# Altium PCB PCB2.PcbDoc
Units mil, origin at the board's own origin, x right, y up, seen from the top; angles counter-clockwise.
Board outline 3945 x 2005 mil, 4 copper layers (Top Layer 1, 3v3, gnd, Bottom Layer 1), stack 23.756 mil thick; 53 components, 40 nets, 256 pads, 252 vias.
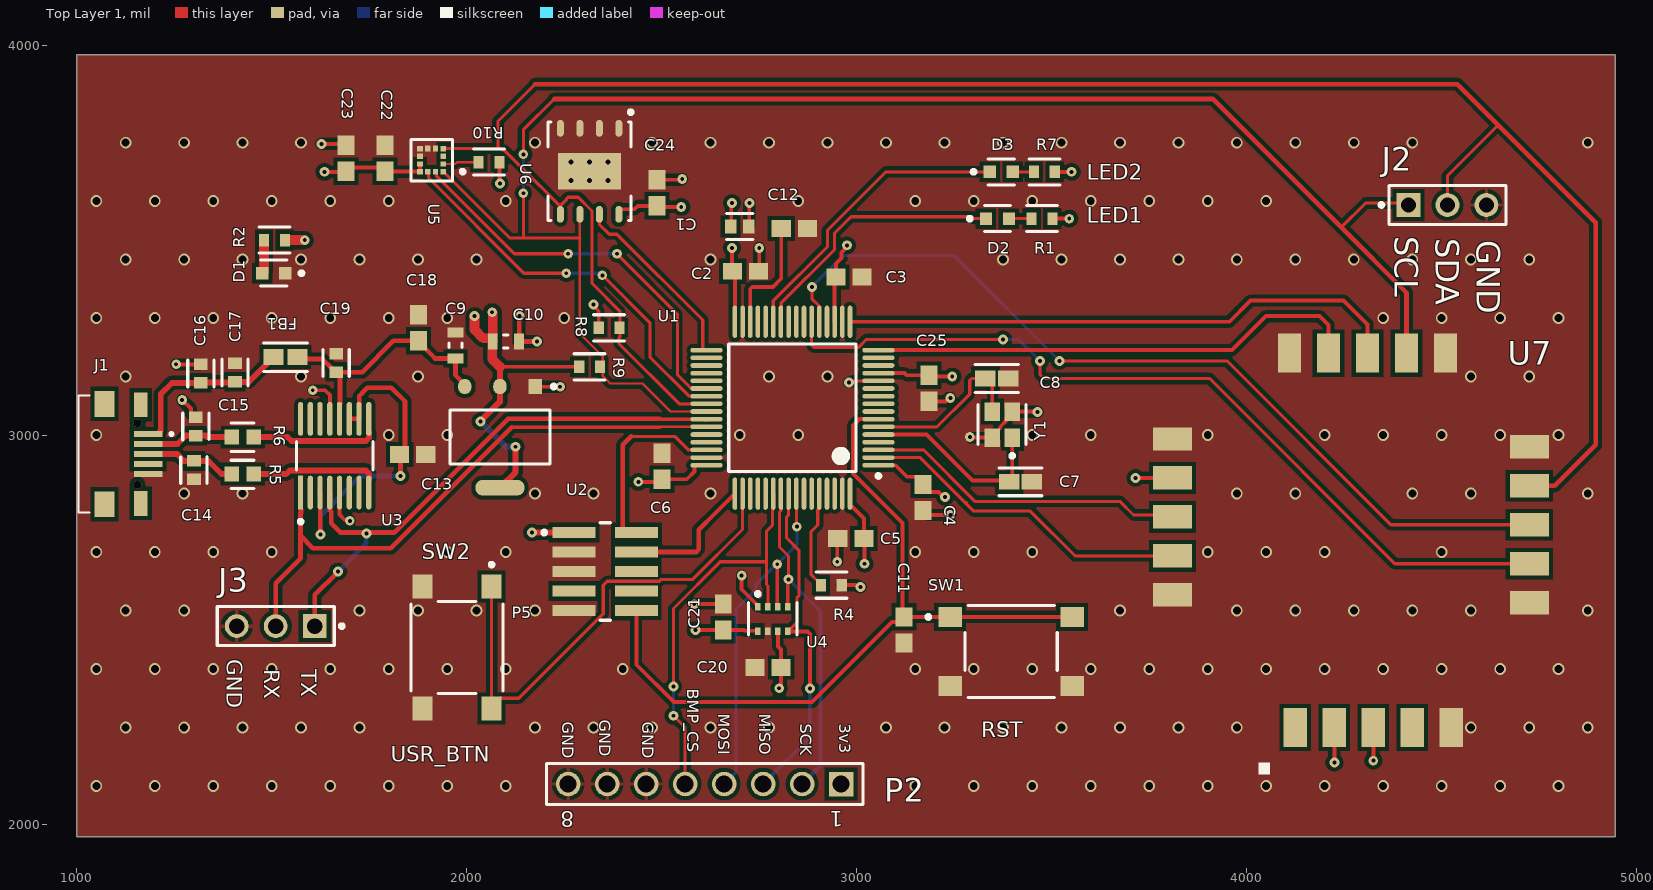
[diagram p0: Top Layer 1 view]
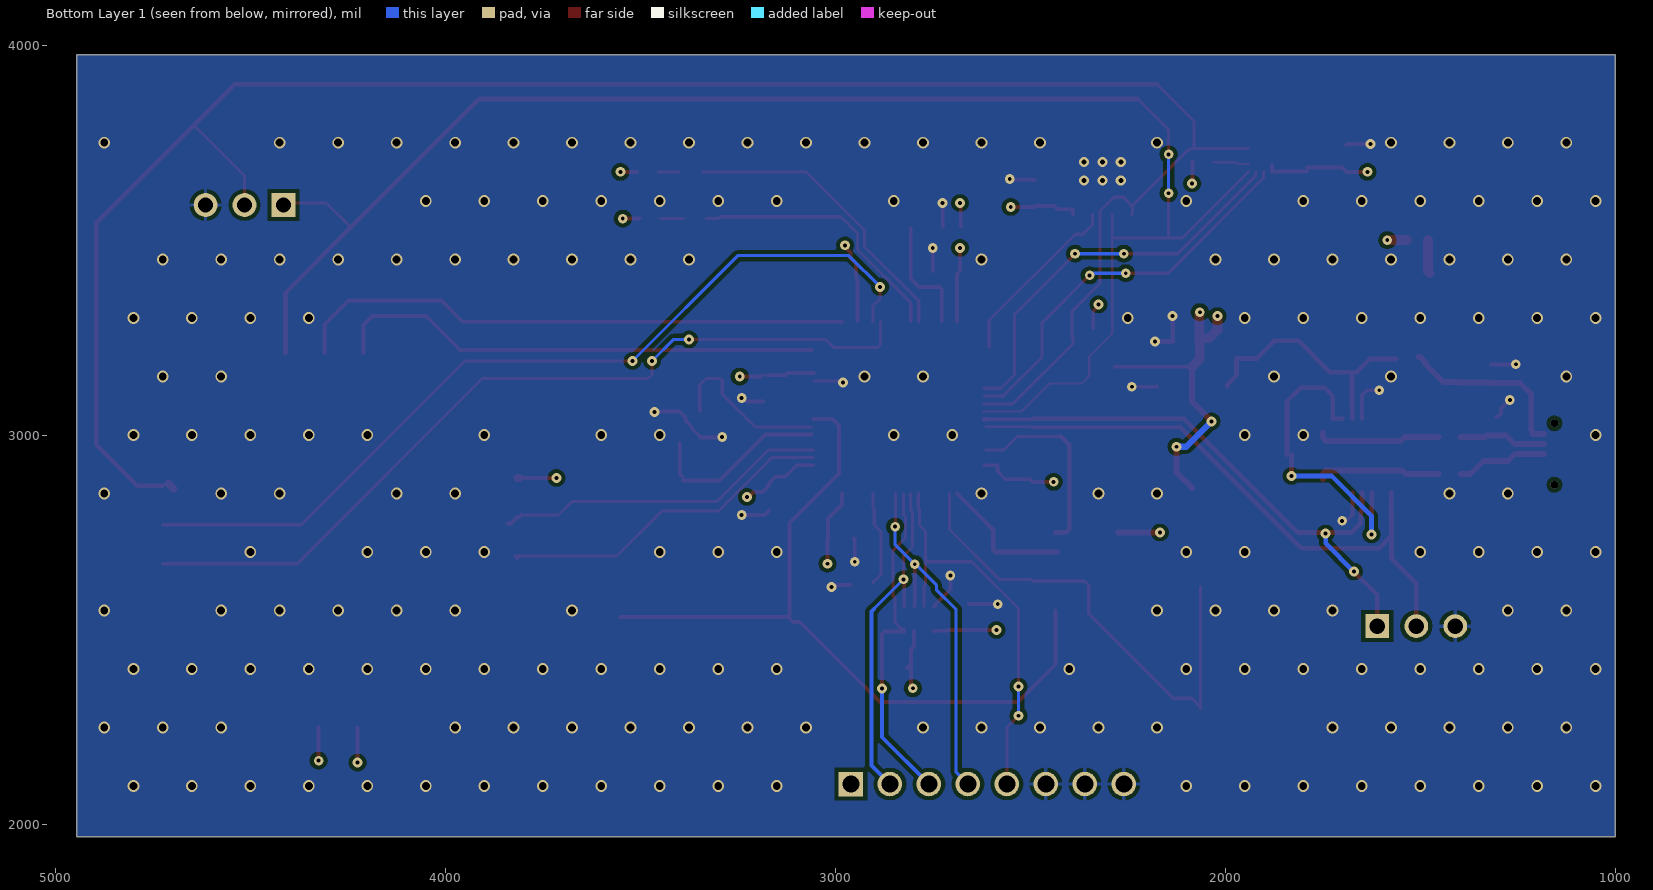
[diagram p1: Bottom Layer 1 view, seen from below]
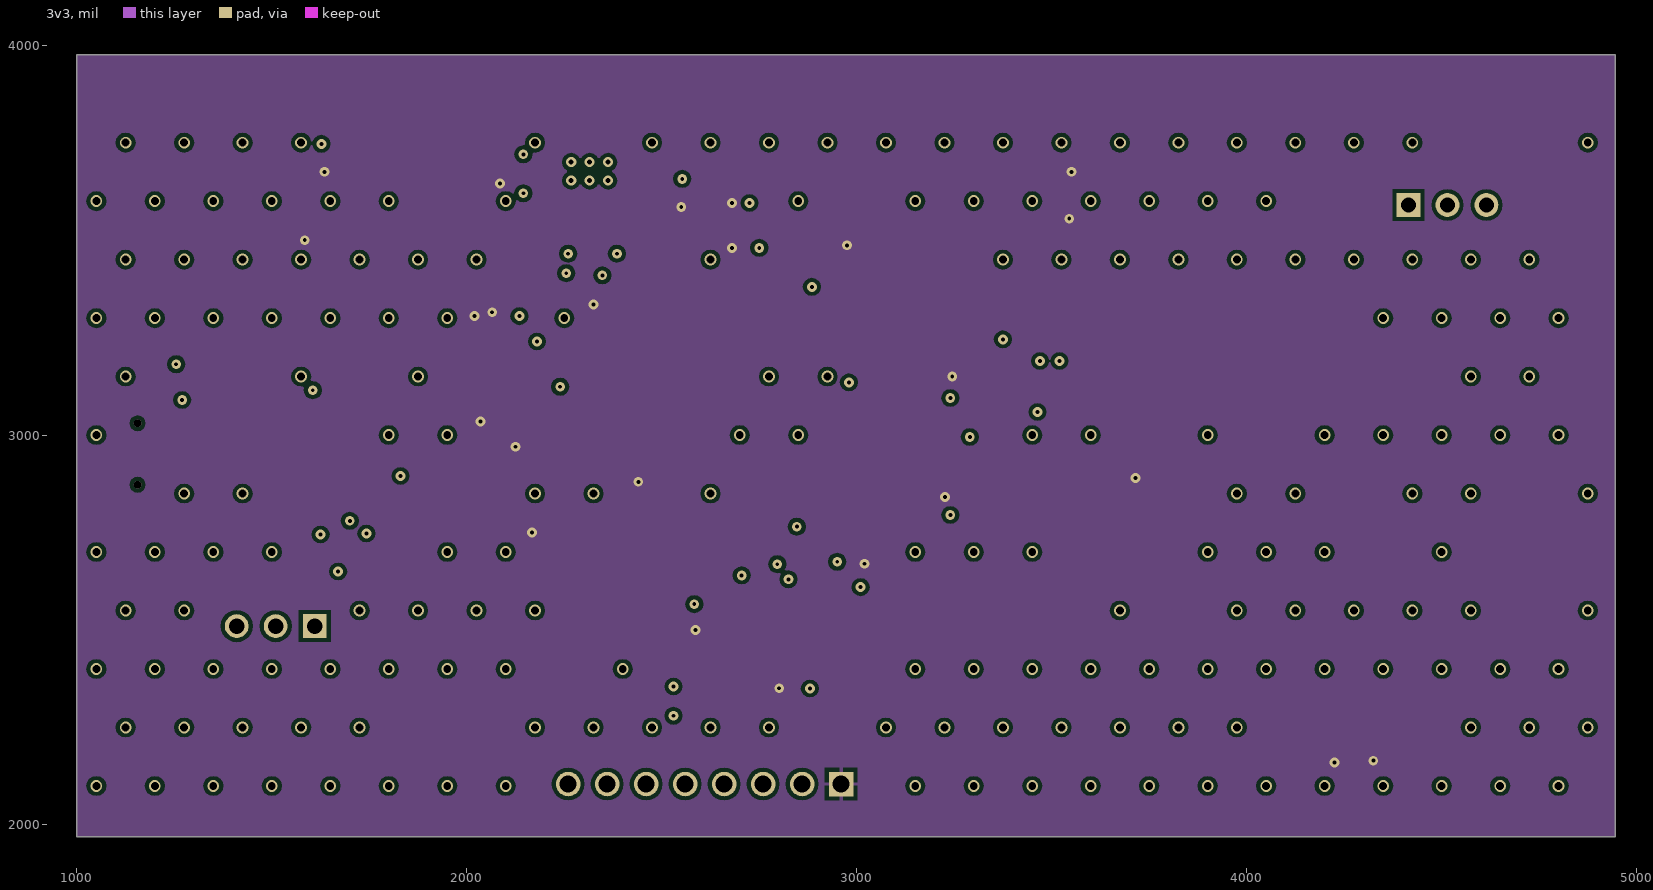
[diagram p2: 3v3]
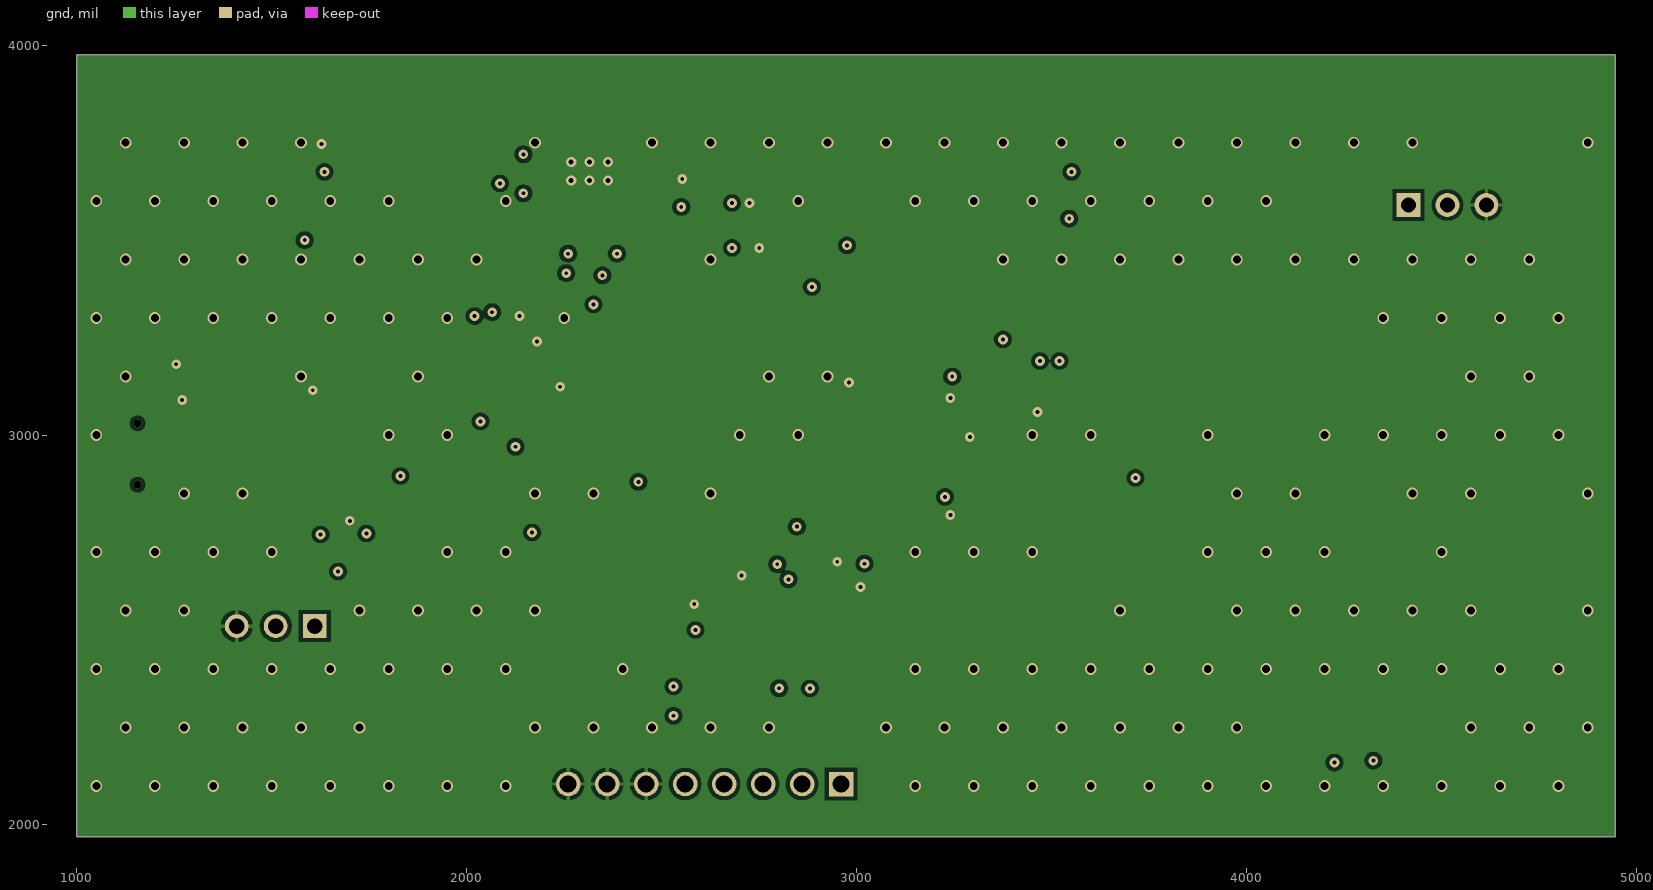
[diagram p3: gnd]
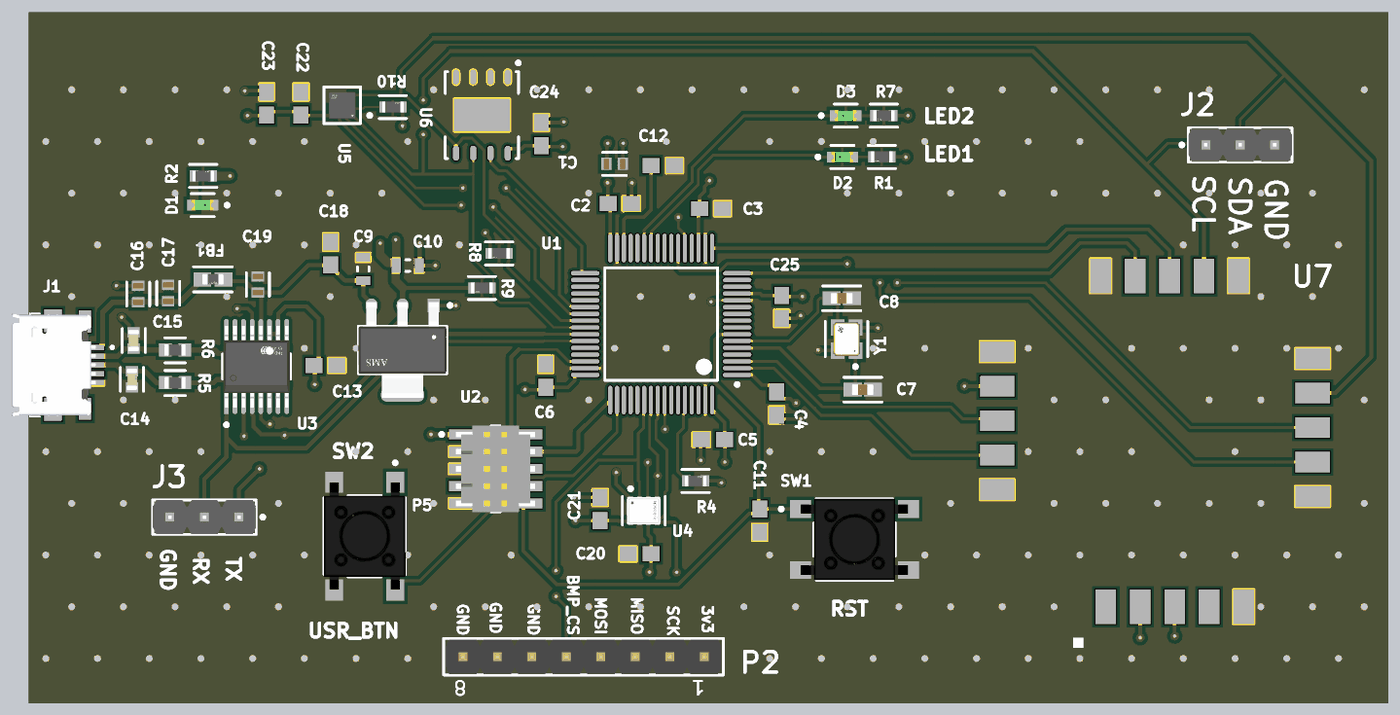
[diagram p4: 3D render of the assembled board from above, using the file's embedded part models]

## Layer stack, top to bottom
Top Solder: solder mask 0.4, Solder Resist, Dk 3.5
Top Layer 1: signal copper 1.378
Dielectric 2: prepreg 2.8, PP-006, Dk 4.1
3v3: signal copper 1.4
Dielectric 1: dielectric 12.6, FR-4, Dk 4.8
gnd: signal copper 1.4
Dielectric 3: prepreg 2.8, PP-006, Dk 4.1
Bottom Layer 1: signal copper 1.378
Bottom Solder: solder mask 0.4, Solder Resist, Dk 3.5

## Board outline
1000,1970 1000,3975 4945,3975 4945,1970

## Design rules (kind name [scope] priority, off if disabled: settings)
Clearance [All] p1: gap=10 ignorepadtopadclearanceinfootprint=FALSE except(0: Arc-Hole Track-Hole SMDPad-Hole THPad-Hole Via-Hole Fill-Hole Poly-Hole Region-Hole Text-Hole; 5: SMDPad-SMDPad; 6: Arc-SMDPad Track-SMDPad)
DiffPairsRouting [All] p1: maxlimit=10 minlimit=10 mostfreqgap=10 toplayer_minwidth=15 toplayer_maxwidth=15 toplayer_prefwidth=15 midlayer1_minwidth=15 midlayer1_maxwidth=15 midlayer1_prefwidth=15 midlayer2_minwidth=15 midlayer2_maxwidth=15 midlayer2_prefwidth=15 bottomlayer_minwidth=15 bottomlayer_maxwidth=15 bottomlayer_prefwidth=15 maxuncoupledlength=500
PolygonConnect [All] p1: thpad.connectstyle=Relief thpad.reliefconductorwidth=10 thpad.reliefentries=4 thpad.polygonreliefangle="90 Angle" thpad.airgapwidth=10 smdpad.connectstyle=Direct smdpad.reliefconductorwidth=10 smdpad.reliefentries=4 smdpad.polygonreliefangle="90 Angle" smdpad.airgapwidth=10 via.connectstyle=Direct via.reliefconductorwidth=10 via.reliefentries=4 via.polygonreliefangle="90 Angle" via.airgapwidth=10
RoutingVias RoutingVias_1 [All] p1: holewidth=28 width=50 viastyle="Through Hole" minholewidth=28 minwidth=50 maxholewidth=28 maxwidth=50
SolderMaskExpansion StichingViaTented [IsVia] p1: expansion=4 istentingtop=TRUE
SolderMaskExpansion SolderMaskExpansion_1 [All] p2: expansion=4 istentingtop=FALSE
Width [All] p1: maxlimit=50 minlimit=6 preferedwidth=10
29 further rules are at their usual default settings.

## Classes and differential pairs
differential pair D: +D_P -D_N
differential pair usb: +usb_P -usb_N

## Components (designator, comment, footprint, x,y, rotation, side; value= is the part's Value field where it differs from the comment)
C1 "" FP-C0603-CG-MFG 2700,3535 r0 top value=4.7uF
C2 "100n" CAPC1608X90X35ML15T15 2715,3420 r180 top
C3 "100n" CAPC1608X90X35ML15T15 2980,3405 r180 top
C4 "100n" CAPC1608X90X35ML15T15 3170,2840 r90 top
C5 "100n" CAPC1608X90X35ML15T15 2985,2735 r0 top
C6 "100n" CAPC1608X90X35ML15T15 2500.37,2920 r270 top
C7 "" FP-C1608-080-0_1-IPC_A 3420,2880 r0 top
C8 "" FP-C1608-080-0_1-IPC_A 3359.15,3145 r0 top
C9 "C1608X5R0J226M080AC" CAPC1608X100X20ML10 1971.02,3230 r90 top
C10 "C1608X5R0J226M080AC" CAPC1608X100X20ML10 2100,3240 r0 top
C11 "0603YC104KAZ2A" CAPC1608X90X35ML15T15 3121.33,2500 r90 top
C12 "0603YC104KAZ2A" CAPC1608X90X35ML15T15 2840,3530 r180 top
C13 "100n" CAPC1608X90X35ML15T15 1861.26,2950 r180 top
C14 "" FP-C0603C-CF-MFG 1300,2910 r270 top value="47 pF"
C15 "" FP-C0603C-CF-MFG 1305,3022.37 r90 top value="47 pF"
C16 "" FP-C0603-CG-MFG 1317.89,3157.37 r90 top value=4.7uF
C17 "" FP-C0603-CG-MFG 1405.24,3160 r90 top value=4.7uF
C18 "100n" CAPC1608X90X35ML15T15 1876.36,3275.09 r270 top
C19 "" FP-C0603-CG-MFG 1665,3185 r90 top value=4.7uF
C20 "100n" CAPC1608X90X35ML15T15 2772.68,2403.46 r0 top
C21 "100n" CAPC1608X90X35ML15T15 2657.68,2533.55 r270 top
C22 "100n" CAPC1608X90X35ML15T15 1790.26,3709.98 r270 top
C23 "100n" CAPC1608X90X35ML15T15 1690.26,3709.98 r270 top
C24 "100n" CAPC1608X90X35ML15T15 2487.69,3621.38 r270 top
C25 "100n" CAPC1608X90X35ML15T15 3185,3120 r90 top
D1 "LTST-C190GKT" FP-LTST-C190GKT-MFG 1505,3415.19 r180 top
D2 "LTST-C190GKT" FP-LTST-C190GKT-MFG 3360.88,3555 r0 top
D3 "LTST-C190GKT" FP-LTST-C190GKT-MFG 3370.47,3675 r0 top
FB1 "BLM18PG121SN1D" FP-BLM18-0_15-t0_8-IPC_A 1535,3200 r0 top
J1 "MICROQTJ" SHOUHAN_MICROQTJ 1155.6,2951.26 r270 top
J2 "90120-0123" FP-90120-0123-MFG 4515,3590 r0 top
J3 "90120-0123" FP-90120-0123-MFG 1510,2510 r180 top
P2 "61300811121" 61300811121 2610,2105 r180 top
P5 "FTSH-105-01-F-DV-K" SMTC-FTSH-105-01-L-DV-K_V 2355,2650 r270 top
R1 "RC0603FR-071KL" FP-RC0603-0_55-IPC_C 3475.17,3555.19 r180 top
R2 "RC0603FR-071KL" FP-RC0603-0_55-IPC_C 1506.64,3500 r0 top
R4 "RC0603FR-071KL" FP-RC0603-0_55-IPC_C 2935,2615 r0 top
R5 "27r" FP-CRCW0603-e3-IPC_B 1425,2900 r0 top
R6 "27r" FP-CRCW0603-e3-IPC_B 1425,2995 r0 top
R7 "RC0603FR-071KL" FP-RC0603-0_55-IPC_C 3481.12,3675 r180 top
R8 "RC0603FR-071KL" FP-RC0603-0_55-IPC_C 2365,3275 r180 top
R9 "RC0603FR-071KL" FP-RC0603-0_55-IPC_C 2315,3175 r180 top
R10 "RC0603FR-071KL" FP-RC0603-0_55-IPC_C 2056.9,3699.98 r0 top
SW1 "PTS645SM43SMTR92LFS" FP-PTS645SM43SMTR92LFS-MFG 3396.11,2445 r0 top
SW2 "PTS645SM43SMTR92LFS" FP-PTS645SM43SMTR92LFS-MFG 1975,2455 r270 top
U1 "STM32F401RCT6" STM-LQFP64_M 2835.19,3070.19 r180 top
U2 "AMS1117-3.3" FP-AMS1117-IPC_C 2084.95,2994.71 r270 top
U3 "FT230XS-R" FP-SSOP-16-MFG 1661.21,2947 r90 top
U4 "BMP280" FP-BMP280-MFG 2784.81,2528.55 r90 top
U5 "LIS2DH12TR" FP-LGA-12-8365767-MFG 1909.84,3704.98 r180 top
U6 "24AA128-I/MF" DFNS-MF8_PS 2315,3676.38 r270 top
U7 "SAM-M10Q-00B-Breakout" SAM-M10Q-00B 4300,2775 r90 top locked
Y1 "NX2520SA-16MHZ-STD-CSW-5" FP-NX2520SA-MFG 3373.21,3026.48 r90 top

## Footprints (in the part's own frame and the unit in brackets; to place one, negate y for a bottom-side part, rotate by r counter-clockwise, add the part's x,y. Pads: shape width x height; smd on the part's side, far side on the other; paste and mask are expansions set on the pad)
61300811121 [mm] "Pin Header, pitch 2.54 mm, THT, Vertical, single row, 8p"
  rect 1.6x1.6 hole 1.1: 1(-8.89,0)
  round 1.6 hole 1.1: 2(-6.35,0) 3(-3.81,0) 4(-1.27,0) 5(1.27,0) 6(3.81,0) 7(6.35,0) 8(8.89,0)
  silkscreen extent -10.31,-1.34 10.31,1.34, body extent -10.16,-1.27 10.16,1.27, height 8.57
CAPC1608X90X35ML15T15 [mm] "Chip Capacitor, 2-Leads, Body 1.60x0.81mm, IPC Low Density"
  rect 1.25x1.1 smd: 1(-0.85,0) 2(0.85,0)
  body extent -0.88,-0.48 0.87,0.48, height 0.9
CAPC1608X100X20ML10 [mm] "Chip Capacitor, 2-Leads, Body 1.70x0.90mm, IPC Low Density"
  rect 0.65x1.05 smd: 1(-0.85,0) 2(0.85,0)
  silkscreen extent -0.15,-0.42 0.15,0.42, body extent -0.85,-0.45 0.85,0.45, height 1
DFNS-MF8_PS [mm] "SON, 8-Leads, Body 5x6mm, Pitch 1.27mm, Microchip Recommended"
  oval 1.1x0.45 smd: 1(-2.8,1.905) 2(-2.8,0.635) 3(-2.8,-0.635) 4(-2.8,-1.905) 5(2.8,-1.905) 6(2.8,-0.635) 7(2.8,0.635) 8(2.8,1.905)
  rect 2.4x4.1 smd: 9(0,0)
  silkscreen extent -3.97,-2.7 3.2,2.81, body extent -3.05,-2.55 3.05,2.55, height 1
FP-90120-0123-MFG [mm]
  rect 1.55x1.55 hole 1 paste-1000 mask+0: 1(-2.54,0)
  round 1.55 hole 1 paste-1000 mask+0: 2(0,0) 3(2.54,0)
  silkscreen extent -4.42,-1.27 3.81,1.27, body extent -3.91,-1.37 3.91,1.37, height 0.25
FP-AMS1117-IPC_C [mm]
  rect 1.004x0.872 smd paste+0 mask+0: 1(-3.295,2.29)
  rrect100% 1.004x0.872 smd paste+0 mask+0: 2(-3.295,0) 3(-3.295,-2.29)
  rrect87% 1.004x3.182 smd paste+0 mask+0: 4(3.295,0)
  silkscreen extent -3.42,-3.25 1.75,3.63, body extent -3.9,-3.35 3.9,3.35, height 0.25
FP-BLM18-0_15-t0_8-IPC_A [mil]
  rect 51.42x41.66 smd paste+0 mask+0: 1(-30.55,0) 2(30.55,0)
  silkscreen extent -56,-37 56,37, body extent -76,-41 76,41, height 10
FP-BMP280-MFG [mm]
  rect 0.5x0.35 smd paste+0 mask+0: 1(0.8,0.975) 2(0.8,0.325) 3(0.8,-0.325) 4(0.8,-0.975) 5(-0.8,-0.975) 6(-0.8,-0.325) 7(-0.8,0.325) 8(-0.8,0.975)
  silkscreen extent -1.05,-1.58 1.75,1.57, body extent -1.55,-1.8 1.55,1.8, height 0.25
FP-C0603-CG-MFG [mm]
  rect 0.75x0.9 smd paste+0 mask+0: 1(-0.6,0) 2(0.6,0)
  silkscreen extent -0.87,-0.85 0.87,0.85, body extent -1.2,-0.6 1.2,0.6, height 0.25
FP-C0603C-CF-MFG [mm]
  rect 0.75x0.9 smd paste+0 mask+0: 1(-0.6,0) 2(0.6,0)
  silkscreen extent -0.87,-0.85 0.88,0.85, body extent -1.2,-0.6 1.2,0.6, height 0.25
FP-C1608-080-0_1-IPC_A [mil]
  rect 52.4x39.85 smd paste+0 mask+0: 1(-29.15,0) 2(29.15,0)
  silkscreen extent -55,-36 55,36, body extent -75,-40 75,40, height 10
FP-CRCW0603-e3-IPC_B [mil]
  rect 36.81x37.88 smd paste+0 mask+0: 1(-28.17,0) 2(28.17,0)
  silkscreen extent -30,-37 30,35, body extent -56,-29 56,29, height 10
FP-LGA-12-8365767-MFG [mm]
  rect 0.375x0.35 smd paste-1000 mask+0: 1(-0.762,0.75) 2(-0.762,0.25) 3(-0.762,-0.25) 4(-0.762,-0.75) 7(0.763,-0.75) 8(0.763,-0.25) 9(0.763,0.25) 10(0.763,0.75)
  rect 0.35x0.375 smd paste-1000 mask+0: 5(-0.25,-0.763) 6(0.25,-0.763) 11(0.25,0.763) 12(-0.25,0.763)
  silkscreen extent -2.15,-1.35 1.35,1.35, body extent -1.58,-1.58 1.58,1.57, height 0.25
FP-LTST-C190GKT-MFG [mm]
  rect 0.8x0.8 smd paste+0 mask+0: 1(-0.75,0) 2(0.75,0)
  silkscreen extent -1.92,-0.85 0.85,0.85, body extent -1.25,-0.55 1.25,0.55, height 0.25
FP-NX2520SA-MFG [mm]
  rect 1.2x1 smd paste+0 mask+0: 1(-0.85,-0.65) 2(0.85,-0.65) 3(0.85,0.65) 4(-0.85,0.65)
  silkscreen extent -2.15,-1.56 1.3,1.58, body extent -1.55,-1.25 1.55,1.25, height 0.25
FP-PTS645SM43SMTR92LFS-MFG [mm]
  rect 1.55x1.3 smd paste+0 mask+0: 1(-3.975,2.25) 2(3.975,2.25) 3(-3.975,-2.25) 4(3.975,-2.25)
  silkscreen extent -5.52,-3 3,3, body extent -4.85,-3.1 4.85,3.1, height 0.25
FP-RC0603-0_55-IPC_C [mil]
  rect 25.93x31.97 smd paste+0 mask+0: 1(-26.64,0) 2(26.64,0)
  silkscreen extent -40,-33 40,33, body extent -44,-22 44,22, height 10
FP-SSOP-16-MFG [mm]
  rect 2.2x0.345 smd paste+0 mask+0: 1(-2.4,2.222)
  rrect100% 2.2x0.345 smd paste+0 mask+0: 2(-2.4,1.587) 3(-2.4,0.952) 4(-2.4,0.317) 5(-2.4,-0.318) 6(-2.4,-0.953) 7(-2.4,-1.588) 8(-2.4,-2.222) 9(2.4,-2.222) 10(2.4,-1.587) 11(2.4,-0.952) 12(2.4,-0.317) 13(2.4,0.318) 14(2.4,0.953) 15(2.4,1.588) 16(2.4,2.222)
  silkscreen extent -4.42,-2.5 0.93,2.5, body extent -3.6,-2.75 3.6,2.75, height 0.25
SAM-M10Q-00B [mil]
  rect 100x60 smd: 1(-525,175) 2(-525,75) 3(-525,-25) 4(-525,-125) 5(-525,-225) 11(435,-210) 12(435,-110) 13(435,-10) 14(435,90) 15(435,190)
  rect 60x100 smd: 6(-205,-425) 7(-105,-425) 8(-5,-425) 9(95,-425) 10(195,-425) 16(215,490) 17(115,490) 18(15,490) 19(-85,490) 20(-185,490)
  Top Layer 1 lines w10: -85,490 -90,485 ; 15,485 -1.42,468.58 -1.42,459.77 ; -90,485 -85,480 ; -90,485 -85,480 ; -90,485 -85,480 ; -90,485 -85,480 ; -90,485 -85,480 ; -90,485 -85,480 ; -90,485 -85,480 ; -90,485 -85,480
  Top Layer 1 lines w20: 115,490 115,484.42 ; 87.15,-397.15 95,-405 100,-410
  silkscreen extent -645,240 -615,270
SHOUHAN_MICROQTJ [mm]
  rect 0.4x1.85 smd: 1(-1.3,0.685) 2(-0.65,0.685) 3(0,0.685) 4(0.65,0.685) 5(1.3,0.685)
  rect 1.625x0.9 smd: SH1(-3.212,0.21) SH2(3.212,0.21)
  rect 1.69x1.3 smd: SH3(-3.27,-2.15) SH4(3.27,-2.15)
  round 0.5 hole 0.5 unplated: ""(-2,0) ""(2,0)
  silkscreen extent -3.8,-3.85 3.8,2.31, body extent -3.8,-5.2 3.8,1, height 2.58
SMTC-FTSH-105-01-L-DV-K_V [mm] "CONN, 10-Leads, Body 6.35x3.43mm, Pitch 1.27mm"
  rect 0.74x2.79 smd: 1(-2.54,-2.035) 2(-2.54,2.035) 3(-1.27,-2.035) 4(-1.27,2.035) 5(0,-2.035) 6(0,2.035) 7(1.27,-2.035) 8(1.27,2.035) 9(2.54,-2.035) 10(2.54,2.035)
  silkscreen extent -3.18,-4.1 3.17,0.34, body extent -3.17,-2.92 3.18,2.92, height 6.12
STM-LQFP64_M [mm] "Thin QFP, 64-Leads, Body 10x10mm, Pitch 0.5mm, IPC Low Density"
  oval 2.1x0.3 smd: 1(-5.6,3.75) 2(-5.6,3.25) 3(-5.6,2.75) 4(-5.6,2.25) 5(-5.6,1.75) 6(-5.6,1.25) 7(-5.6,0.75) 8(-5.6,0.25) 9(-5.6,-0.25) 10(-5.6,-0.75) 11(-5.6,-1.25) 12(-5.6,-1.75) 13(-5.6,-2.25) 14(-5.6,-2.75) 15(-5.6,-3.25) 16(-5.6,-3.75) 33(5.6,-3.75) 34(5.6,-3.25) 35(5.6,-2.75) 36(5.6,-2.25) 37(5.6,-1.75) 38(5.6,-1.25) 39(5.6,-0.75) 40(5.6,-0.25) 41(5.6,0.25) 42(5.6,0.75) 43(5.6,1.25) 44(5.6,1.75) 45(5.6,2.25) 46(5.6,2.75) 47(5.6,3.25) 48(5.6,3.75)
  oval 0.3x2.1 smd: 17(-3.75,-5.6) 18(-3.25,-5.6) 19(-2.75,-5.6) 20(-2.25,-5.6) 21(-1.75,-5.6) 22(-1.25,-5.6) 23(-0.75,-5.6) 24(-0.25,-5.6) 25(0.25,-5.6) 26(0.75,-5.6) 27(1.25,-5.6) 28(1.75,-5.6) 29(2.25,-5.6) 30(2.75,-5.6) 31(3.25,-5.6) 32(3.75,-5.6) 49(3.75,5.6) 50(3.25,5.6) 51(2.75,5.6) 52(2.25,5.6) 53(1.75,5.6) 54(1.25,5.6) 55(0.75,5.6) 56(0.25,5.6) 57(-0.25,5.6) 58(-0.75,5.6) 59(-1.25,5.6) 60(-1.75,5.6) 61(-2.25,5.6) 62(-2.75,5.6) 63(-3.25,5.6) 64(-3.75,5.6)
  silkscreen extent -5.72,-4.15 4.15,4.57, body extent -5,-5 5,5, height 1.6

## Part data
C1 C16 C17 C19: library part CMP-2006-02256-2, "CAP CER 4.7UF 6.3V X5R 0603", Capacitance=4.7uF, Manufacturer=Kemet, Manufacturer Part Number=C0603C475K9PACTU, Package=C0603-CG, Temperature="-55°C to +85°C", Temperature Characteristic=X5R, Temperature Coefficient=15%, Temperature Range High=+85°C, Temperature Range Low=-55°C, Tolerance=10%, Voltage Rating=6.3V, Automotive=No, Category=Cap, ComponentLink2Description=Datasheet, ComponentLink2URL=https://content.kemet.com/datasheets/KEM_C1006_X5R_SMD.pdf, Device Class L1="Passive Components", Device Class L2=Capacitors, Device Class L3="Ceramic Capacitors", Digikey Description="CAP CER 4.7UF 6.3V X5R 0603", Height=0.9mm, Ipc Land Pattern Name=CAPC16080X80, Lead Free=Yes, Material=Ceramic, Mouser Description="Multilayer Ceramic Capacitors MLCC - SMD/SMT 6.3volts 4.7uF X5R 10%", Octopart=https://octopart.com/c0603c475k9pactu-kemet-104242, RoHS=TRUE
C2 C3 C4 C5 C6 C13 C18 C20 C21 C22 C23 C24 C25: library part CMP-2006-04496-1, Manufacturer="AVX Interconnect / Elco", Part Number=0603YC104KAZ2A
C7 C8: library part CMP-08246-005081-1, "Multilayer Ceramic Capacitors 8pF ±0.5pF 50V C0G SMD 0603", Capacitance=8pF, Case Code (Imperial)=0603, Case Code (Metric)=1608, Dielectric=C0G, Dielectric Material=Ceramic, Insulation Resistance=10GR, Max Operating Temperature=125°C, Min Operating Temperature=-55°C, Package Quantity=1, Voltage Rating=50V, Case/Package=0603, Construction=Flat, Depth=0.8mm, Height=0.8mm, Lead Free="Lead Free", Length=1.6mm, Mount="Surface Mount", Packaging="Tape and Reel", Radiation Hardening=No, REACH SVHC="No SVHC", RoHS Compliant=Yes, Series=C, Termination=SMD/SMT, Thickness=0.037inch, Voltage Rating (DC)=50V, Weight=7.1E-05oz, Width=0.031inch
C9 C10: library part CMP-2000-05440-1, "Chip Capacitor, 22 uF, +/- 20%, 6.3 V, -55 to 85 degC, 1608 (0603 Metric), RoHS, Tape and Reel", Capacitance=22µF, Manufacturer=TDK, Operating Temperature=-55degC~85degC, Package / Case=0603(1608Metric), Package Description="2-Pin Surface Mount Device, Body 1.6 x 0.8 mm", Package Reference=603, PCN Part Number=MLCCPartNumberChange30/Nov/2012, Ratings=-, Standard Package=1, Temperature Coefficient=X5R, Tolerance=±20%, Voltage - Rated=6.3V, Applications=GeneralPurpose, Category=Capacitors, Datasheet URL=http://www.farnell.com/datasheets/1913358.pdf, Datasheet Version=Mar-15, Design Resources=20WNon-IsolatedBuckLEDDriverUsingPLLNK460KG, Family=CeramicCapacitors, Features=-, Height - Seated (Max)=-, Kits=445-9003-KIT-ND-KITCAPCERHICAPMLCCSMD, Lead Spacing=-, Lead Style=-, Manufacturer URL=http://www.tdk.com/, Mounting Type=SurfaceMount,MLCC, Online Catalog=CSeries,GeneralPurpose, Other Names=445-8028-1, Packaging=CutTape(CT), Product Training Modules=CSeriesGeneralApplicationsSEAT,CCV,andTVCLDesignToolsGuidetoReplacinganElectrolyticCapacitorwithanMLCC, RoHS Information=RoHSCertificate-MLCC, Series=C, Size / Dimension="0.063\"Lx0.031\"W(1.60mmx0.80mm)", Thickness (Max)="0.039\"(1.00mm)"
C11 C12: library part CMP-2006-04496-1, Manufacturer="AVX Interconnect / Elco", Part Number=0603YC104KAZ2A
C14 C15: library part CMP-2006-03321-2, "CAP CER 47PF 100V 5% NP0 0603", Capacitance="47 pF", Manufacturer=KEMET, Manufacturer Part Number=C0603C470J1GACTU, Package=C0603C-CF, Temperature="-55°C to +125°C", Temperature Characteristic=C0G, Temperature Coefficient=30ppm/°C, Temperature Range High=+125°C, Temperature Range Low=-55°C, Tolerance=0.05, Voltage Rating="100 V", Automotive=Yes, Automotive Grade="Grade 1", Category=Cap, ComponentLink2Description=Datasheet, ComponentLink2URL=https://api.kemet.com/component-edge/download/datasheet/C0603C100J5GACAUTO.pdf, Device Class L1="Passive Components", Device Class L2=Capacitors, Device Class L3="Ceramic Capacitors", Digikey Description="CAP CER 47PF 100V 5% NP0 0603", Height=0.87mm, Lead Free=Yes, Material=Ceramic, Mouser Description="Multilayer Ceramic Capacitors MLCC - SMD/SMT 100volts 47pF C0G 5%", Octopart=https://octopart.com/c0603c470j1gactu-kemet-3768219, RoHS=TRUE
D1 D2 D3: library part CMP-22017-000005-2, "LED GREEN CLEAR CHIP SMD", Case Code (Imperial)=0603, Case Code (Metric)=1608, Color=Green, Forward Current=30mA, Forward Voltage=2.1V, Lens Color=Colorless, Max Operating Temperature=85°C, Min Operating Temperature=-55°C, Package Quantity=1, Power Dissipation=100mW, Reverse Voltage=5V, Test Current=10mA, Voltage=2V, Case/Package=0603, Depth=0.8mm, Dominant Wavelength=569nm, Height=0.8mm, Illumination Color=Green, Lead Free="Lead Free", Length=1.6mm, Lens Style=Clear, Lens Transparency=Clear, Luminous Intensity=6mcd, Mount="Surface Mount", Number of Elements=1, Number of LEDs=1, Number of Pins=2, Packaging="Tape and Reel", Power Rating=100mW, Radiation Hardening=No, Viewing Angle=130°, Wavelength=565nm, Width=0.8mm
FB1: library part CMP-0686-00557-7, "Chip Ferrite Bead, 0603, 120Ω @ 100MHz, 0.05Ω, 25%, 2A", Case Code (Imperial)=0603, Case Code (Metric)=1608, Current Rating=2A, DC Resistance (DCR)=50mR, Frequency=100MHz, Max Operating Temperature=125°C, Min Operating Temperature=-55°C, Package Quantity=1, Tolerance=25%, Case/Package=0603, Core Material=Ferrite, DC Current=2A, Depth=0.8mm, Height=0.8mm, Impedance=120R, Lead Free="Lead Free", Length=1.6mm, Material=Steel, Max Current Rating=2A, Max DC Current=2A, Number of Circuits=1, Number of Lines=1, Number of Pins=2, Packaging="Tape and Reel", Radiation Hardening=No, REACH SVHC="No SVHC", RoHS Compliant=Yes, Shielding=Unshielded, Termination=SMD/SMT, Test Frequency=100MHz, Width=0.8mm
J1: Package=None, Availability="Not in stock", Check_prices=https://www.snapeda.com/parts/MICROQTJ/Shouhan/view-part/?ref=eda, MF="shou han", MP=MICROQTJ, Price=None, SnapEDA_Link=https://www.snapeda.com/parts/MICROQTJ/Shouhan/view-part/?ref=snap
J2 J3: library part CMP-04776-000237-1, "CONN HEADER VERT 3POS 2.54MM", Color=Black, Contact Resistance=20mR, Current Rating=3A, Max Operating Temperature=125°C, Max Voltage Rating (DC)=350.35kV, Min Operating Temperature=-55°C, Voltage Rating=350V, Contact Gender=Male, Contact Material=Brass, Contact Mating Length=6.75mm, Contact Plating=Tin, Contact Post Length=2.9mm, Gender=Male, Glow Wire Compliant=Non-compliant, Housing Color=Black, Housing Material=Polyester, Lead Free="Lead Free", Mount="Through Hole", Number of Circuits=3, Number of Contacts=3, Number of Positions=3, Number of Rows=1, Orientation=Vertical, Packaging=Tray, Pitch=2.54mm, Radiation Hardening=No, REACH SVHC="No SVHC", RoHS Compliant=Yes, Series=90120, Termination=Solder, Voltage Rating (AC)=350V
P2: library part CMP-1502-01076-1, "THT Vertical Pin Header WR-PHD, Pitch 2.54 mm, Single Row, 8 pins", Contact Resistance=20mOhm, Manufacturer="Wurth Elektronik", Operating Temperature=-40to105degC, Rated Current=3A, Withstanding Voltage=500VAC, Working Voltage=250VAC, Datasheet URL=https://katalog.we-online.de/em/datasheet/6130xx11121.pdf, Gender=Male, Manufacturer URL=http://www.we-online.de, Mounting Technology=THT, Orientation=Vertical, Package Reference=61300811121, Packaging=Bag, Part Number=61300811121, Pin Number=8, Pitch=2.54mm, Publisher=WurthElektronik, Row Number=Single
P5: library part CMP-2000-05352-1, "Male Header, Pitch 1.27 mm, 2 x 5 Position, Height 6.12 mm, RoHS, Tube", Color=Black, Manufacturer=Samtec, Package Description="Male Header, Pitch 1.27 mm, 2 x 5 Position, Height 5.97 mm, Tail Length 4.32 mm", Package Reference=FTSH-105-01-L-DV-K, Category=Connectors,Interconnects, Connector Type=Header,Shrouded, Contact Finish=Gold, Contact Finish Thickness=3µin(0.08µm), Contact Mating Length="0.120\"(3.05mm)", Contact Type=MalePin, Datasheet URL=http://suddendocs.samtec.com/prints/ftsh-1xx-xx-xxx-dv-xxx-mkt.pdf, Datasheet Version="Rev. ET, 10/1995", Family=RectangularConnectors-Headers,MalePins, Fastening Type=-, Features=-, Manufacturer URL=http://www.samtec.com/, Mounting Type=SurfaceMount, Number of Positions=10, Number of Positions Loaded=All, Number of Rows=2, Package URL=http://suddendocs.samtec.com/prints/ftsh-1xx-xx-xxx-dv-xxx-footprint.pdf, Packaging=Tube, Pitch="0.050\"(1.27mm)", Row Spacing="0.050\"(1.27mm)", Series=FTSH, Termination=Solder
R1 R2 R4 R7 R8 R9 R10: library part CMP-1659-00009-5, "RES 1K OHM 1% 1/10W 0603", Case Code (Imperial)=0603, Case Code (Metric)=1608, Max Operating Temperature=155°C, Max Power Dissipation=100mW, Min Operating Temperature=-55°C, Resistance=1kR, Resistance Tolerance=1%, Resistor Type="Thick Film", Temperature Coefficient=100ppm/°C, Voltage Rating=50V, Case/Package=0603, Construction=Rectangular, Contact Plating=Tin, Depth=0.8mm, Features="Moisture Resistant", Height=0.45mm, Lead Free="Lead Free", Length=1.6mm, Military Standard=Not, Number of Terminations=2, Packaging="Tape and Reel", Power Rating=100mW, Radiation Hardening=No, REACH SVHC="No SVHC", RoHS Compliant=Yes, Series=RC, Size Code=0603, Technology="THICK FILM", Termination=SMD/SMT, Tolerance=1%
R5 R6: library part CMP-2000-03145-2, "RES Thick Film, 27Ω, 5%, 0.1W, 200ppm/°C, 0603", Case Code (Imperial)=0603, Case Code (Metric)=1608, Max Operating Temperature=155°C, Max Power Dissipation=100mW, Min Operating Temperature=-55°C, Package Quantity=1, Resistance=27R, Temperature Coefficient=200ppm/°C, Tolerance=5%, Voltage Rating=75V, Case/Package=0603, Composition="Thick Film", Contact Plating=Tin, Depth=0.85mm, Features="Automotive AEC-Q200", Height=0.45mm, Lead Free="Lead Free", Length=1.55mm, Military Standard=Not, Number of Pins=2, Number of Terminations=2, Packaging="Tape and Reel", Power Rating=100mW, Radiation Hardening=No, Termination=Solder, Voltage Rating (DC)=75V, Weight=7.1E-05oz, Width=0.85mm
SW1 SW2: library part CMP-2000-05160-2, "SWITCH TACTILE SPST-NO 0.05A 12V", Case/Package=SMD/SMT, Color=Black, Contact Resistance=100mR, Current Rating=50mA, Max Operating Temperature=60°C, Max Voltage Rating (DC)=12V, Min Operating Temperature=-20°C, Operating Force=160gf, Package Quantity=1, Actuator Length=0.85mm, Actuator Material=Nylon, Actuator Type=Standard, Contact Material=Silver, Contact Plating=Silver, Depth=9mm, Illumination Type=Non-Illuminated, Lead Free="Lead Free", Length=6mm, Max Current Rating=50mA, Mechanical Life=100000Cycles, Mount="Surface Mount", Orientation=Straight, Packaging="Tape and Reel", REACH SVHC="No SVHC", Switch Function=Off-Mom, Termination="Gull Wing", Throw Configuration=SPST, Voltage Rating (DC)=12V
U1: library part CMP-0243-00091-2, "ARM Cortex-M4 32-bit MCU+FPU, 105 DMIPS, 256 kB Flash, 64 kB Internal RAM, 48 I/Os, 64-pin LQFP, -40 to 85 degC, Tray", I/Os (High Current)=48, Manufacturer=STMicroelectronics, Operating Frequency(F) (Processor speed) (MHz)=84, Supply Voltage(Vcc) max (V)=3.6, Supply Voltage(Vcc) min (V)=1.8, ComponentLink1Description="Manufacturer URL", ComponentLink1URL=http://www.st.com/web/en/home.html, ComponentLink2Description=Datasheet, ComponentLink2URL=http://www.st.com/st-web-ui/static/active/en/resource/technical/document/data_brief/DM00071938.pdf, ComponentLink3Description="Package Specification", ComponentLink3URL=http://www.st.com/st-web-ui/static/active/en/resource/technical/document/datasheet/DM00037051.pdf, Core="ARM Cortex-M4", DatasheetVersion="Rev. 1", FLASH Size (Prog) (kB)=256, Internal RAM Size (kB)=64, Mounting Technology="Surface Mount", PackageDescription="64-Pin Low Profile Quad Flat Package, 10 x 10 mm Body, 0.5 mm Pitch", PackageReference=LQFP64, PackageVersion="Rev. 4, 06/2013", Packing=Tray, PartNumber=STM32F401RCT6
U2: library part CMP-209535-000001-1, "LDO Voltage Regulators 1A, 3.3V", Dropout Voltage=1.1V, Manufacturer="Advanced Monolithic Systems", Max Junction Temp=+125°C, Max Power Dissipation=1.2W, Max Supply Voltage=15V, Nominal Supply Current=5mA, Output Current=1A, Output Voltage=3.3V, Package=AMS1117, Temperature="-40°C to +125°C", Temperature Range Low=-40°C, Automotive=No, Category=IC, ComponentLink2Description=Datasheet, ComponentLink2URL=http://www.advanced-monolithic.com/pdf/ds1117.pdf, Device Class L1="Integrated Circuits (ICs)", Device Class L2="Power Management ICs", Device Class L3="Voltage Regulators - Linear", Height=1.8mm, Ipc Land Pattern Name=SOT229P700X180-4, Lead Free=Yes, Manufacturer Part Number=AMS1117-3.3, Number Of Outputs=1, Octopart=https://octopart.com/ams1117-3.3-advanced+monolithic+systems-25899300, Output Type=Fixed, RoHS=TRUE, Standoff Height=0.64mm, Temperature Range High=+125°C
U3: library part CMP-0248-00026-3, "IC USB SERIAL BASIC UART 16SSOP", Case/Package=SSOP, Max Operating Temperature=85°C, Max Supply Voltage=5.5V, Min Operating Temperature=-40°C, Min Supply Voltage=2.97V, Operating Supply Current=8mA, Operating Supply Voltage=5V, Package Quantity=3000, Data Rate=12Mbps, Height=0.059inch, Interface=UART, Length=5mm, Mount="Surface Mount", Number of Channels=1, Number of Pins=16, Packaging="Tape and Reel", Weight=0.004586oz, Width=0.157inch
U4: library part CMP-2000-05076-3, "SENSOR PRESSURE ABS", Case/Package=SMD/SMT, Max Operating Temperature=85°C, Min Operating Temperature=-40°C, Operating Pressure=15.95PSI, Lead Free="Lead Free", Max Pressure=290.08PSI, Number of Pins=8, Output Type=SPI, Port Style="No Port", Pressure Type=Absolute, Termination=SMD/SMT
U5: library part CMP-2000-05369-2, "ACCEL 2-16G I2C/SPI 12LGA", Case/Package=LGA, Max Operating Temperature=85°C, Max Supply Voltage=3.6V, Min Operating Temperature=-40°C, Min Supply Voltage=1.71V, Axis="X, Y, Z", Bandwidth=672Hz, Contact Plating=Gold, Height=1mm, Interface=I2C, Lead Free="Lead Free", Length=2.15mm, Mount="Surface Mount", Number of Pins=12, Output Type=SPI, Packaging="Cut Tape", Radiation Hardening=No, REACH SVHC="No SVHC", Width=2.15mm
U6: library part CMP-0159-00373-1, "128Kbit, 400kHz, 1.7V, I2C Serial EEPROM, 8-Pin DFN Punch Singulated, Industrial Temperature", DatasheetVersion="revR, Apr-2009", PackageDescription="8-Lead Plastic Dual Flat, No Lead Package (MF) - 6x5 mm Body [DFN-S] Punch Singulated", PackageReference=DFNS-MF8_PS, PackageVersion="revBB, Aug-2009"
Y1: library part CMP-2000-05279-2, "CRYSTAL 16.0000MHZ 8PF SMD", Case/Package=SMD/SMT, ESR (Equivalent Series Resistance)=80R, Frequency=16MHz, Frequency Stability=25ppm, Frequency Tolerance=15ppm, Load Capacitance=8pF, Max Operating Temperature=85°C, Min Operating Temperature=-40°C, Package Quantity=3000, Height=0.022inch, Length=0.098inch, Mount="Surface Mount", Number of Pins=4, Packaging="Tape and Reel", Series Resistance=80R, Width=0.079inch

## Via types
v1: diameter 30, hole 20, Top Layer 1 to Bottom Layer 1, tented both sides, 182 vias
v2: diameter 25, hole 10, Top Layer 1 to Bottom Layer 1, tented both sides, 64 vias
v3: diameter 25.98, hole 12.99, Top Layer 1 to Bottom Layer 1, tented top, 6 vias

## Nets (pads, with @x,y where several pads share a name; then routed paths per layer and width w, separated by ;. In a path a pad name is that pad's centre, name@x,y a point inside that pad or via, vN(x,y) a via of type N, cw(c..) or ccw(c..) an arc to the next point about the centre after c; other vN are vias at no path point)
3v3: C1.1 C2.2 C3.2 C4.2 C5.2 C6.2 C10.1 C20.2 C21.2 C22.2 C23.2 C24.2 C25.2 P2.1 P5.1 R1.1 R2.2 R7.1 R8.2 R9.2 R10.2 U1.1 U1.13 U1.19 U1.32 U1.48 U1.64 U2.2 U2.4 U4.6 U4.8 U5.9 U5.10 U6.8 U7.2 U7.3 U7.17 | length 3510.2
  Top Layer 1 w6: U1.48 U1.48@2619.71,2922.55
  Top Layer 1 w10: v2(1635,3675) 1688.74,3675 C23.2 1700.4,3686.65 C22.2@1790.26,3686.65 ; C22.2 1791.32,3675.45 U5.10 U5.9@1879.82,3692.93 ; R10.2 2084.27,3699.25 2084.27,3645.73 v2(2085,3645) ; 2084.95,3175.05 R9.2@2283.32,3175.05 ; v2(2325,3335) 2325,3330.94 2338.36,3317.58 R8.2 ; U6.8 2390,3579 2430.09,3579 2439,3587.91 C24.2 2490.6,3585 v2(2550,3585) ; v2(2440,2880) 2493.84,2880 C6.2 2564,2886.54 2584,2906.54 2584,2922.55 U1.48 ; v2(2586.46,2499.91) 2586.64,2500.09 C21.2 2710.62,2500.09 2712.68,2498.03 2745.45,2498.03 U4.8 ; C1.1 2678.19,3536.81 2678.19,3593.19 v2(2680,3595) ; v2(2680,3480) 2680,3421.54 C2.2 2687.55,3413.99 U1.32 ; U4.6 2797.61,2458.1 2806.14,2449.57 C20.2@2806.14,2412.86 ; v2(2801.18,2350.61) 2806.14,2355.58 C20.2 ; C20.2@2816,2403 C20.2@2815.54,2403.46 ; U1.19 2943.45,3397.45 C3.2 2946.54,3440 2961.04,3454.5 2961.04,3468.48 2975,3482.44 v2(2975,3486.5) ; U1.64 2982.82,2822 3018.46,2786.36 C5.2 3020,2733.46 v2(3020,2670) ; U1.1 3099,2922.55 3128.48,2893.07 3153.35,2893.07 3170,2876.42 C4.2 3170,2870.51 3186.65,2853.86 3209.89,2853.86 3222.34,2841.4 v2(3226.4,2841.4) ; U1.13 3122.31,3158.77 3127.62,3153.46 C25.2@3175,3153.46 ; C25.2 3188.46,3150 v2(3245,3150) ; R1.1 3502,3555 v2(3545,3555) ; R7.1 v2(3551.12,3675) ; v2(3715,2890) U7.17 ; v2(4225,2160) U7.2 ; v2(4325,2165) U7.3 ; C20.2 C20.2@2806.14,2412.86 ; C20.2 C20.2@2815.54,2403.46 ; C20.2@2806.14,2412.86 C20.2@2815.54,2403.46
  Top Layer 1 w16: v2(2035.01,3035.05) 2084.95,3084.99 U2.2 2084.95,3169 2084.95,3175.05 ; U2.4 2125,2905.03 v2(2125,2970) ; v2(2167.47,2750) P5.1
  Top Layer 1 w25: R2.2 1584.09,3500 v2(1584.35,3499.74) ; v2(2020,3305) 2020,3270.21 2042.04,3248.17 2066.24,3248.17 C10.1@2066.54,3247.87 ; C10.1@2065,3240 2065,3195 2084.95,3175.05 ; v2(2065,3315) 2066.54,3313.46 C10.1@2066.54,3247.87 ; C10.1 C10.1@2066.54,3247.87
  Bottom Layer 1 w16: v2(2035.01,3035.05) 2100.06,2970 v2(2125,2970)
BMP_CS: P2.5 U1.54 U4.2 | length 1050.5
  Top Layer 1 w8: v2(2530,2280) 2560,2250 P2.5 ; v2(2530,2355) 2530,2555 2650,2675 2768.5,2675 ; U4.2 2772.02,2613.04 2768.5,2616.56 2768.5,2675 ; U1.54 2787.22,2849.2 2787.22,2813.04 2787.4,2812.86 2783.87,2809.33 2783.87,2768.87 2768.5,2753.5 2768.5,2675
  Bottom Layer 1 w8: v2(2530,2280) v2(2530,2355)
D_N: R6.2 U3.9 | length 318
  Top Layer 1 w15: R6.2 1540,2995 1550.32,2984.68 1741.21,2984.68 1750,2993.47 1750,3005.89 U3.9@1749.42,3006.47
D_P: R5.2 U3.8 | length 317.6
  Top Layer 1 w15: R5.2 1536.76,2900 1546.08,2909.32 1741.21,2909.32 1750,2900.53 1750,2888.1 U3.8@1749.42,2887.53
DEBUG_RX: J3.2 U1.43 U3.1 | length 1552.5
  Top Layer 1 w6: 2495.97,3020.97 U1.43
  Top Layer 1 w8: 2115,3020 2495,3020 2495.97,3020.97
  Top Layer 1 w12: J3.2 1510,2620 1573.71,2683.71 1573.71,2741.29 ; 1573.71,2800 1573.71,2741.29 ; U3.1 1574.51,2852.3 1574.51,2810.11 1575,2809.61 1575,2800 ; 2115,3020 1805,2710 1605,2710 1573.71,2741.29
DEBUG_TX: J3.1 U1.42 U3.4 | length 1476.2
  Top Layer 1 w8: 2494.67,3042 2496.01,3040.66 2609.7,3040.66 U1.42@2609.7,3040.75
  Top Layer 1 w12: J3.1 1610,2590 v2(1670,2650) ; U3.4 1649.02,2852.21 1649.02,2806.59 1652.21,2803.4 1652.21,2774.1 1676.32,2750 1742.51,2750 1813.89,2750 2105.89,3042 2494.67,3042 ; U1.42@2609.7,3040.75 2619.62,3040.75 U1.42
  Bottom Layer 1 w12: v2(1670,2650) 1742.51,2722.51 v2(1742.51,2747.51)
EEPROM_WP: U1.33 U6.7 | length 462.6
  Top Layer 1 w8: U6.7 2340.08,3566.07 2340.08,3539.92 2365,3515 2385,3515 2605,3295 2605,3225
G\P\S\_\R\S\T\: U1.3 U7.18 | length 825.6
  Top Layer 1 w8: U1.3 3171.21,2961.92 3303.13,2830 3675,2830 3710,2795 U7.18@3805,2795
  Top Layer 1 w10: U7.18@3805,2795 U7.18
GND: C1.2 C2.1 C3.1 C4.1 C5.1 C6.1 C7.2 C8.2 C9.2 C10.2 C11.1 C12.1 C13.1 C14.2 C15.2 C16.2 C17.2 C18.1 C19.2 C20.1 C21.1 C22.1 C23.1 C24.1 C25.1 D1.1 J1.5 J2.3 J3.3 P2.6 P2.7 P2.8 P5.3 P5.5 P5.9 R4.2 SW1.3 SW1.4 SW2.3 SW2.4 U1.12 U1.18 U1.31 U1.47 U1.63 U2.1 U3.5 U3.13 U4.1 U4.7 U5.5 U5.6 U5.7 U5.8 U6.1 U6.2 U6.3 U6.4 U6.9 U7.5 U7.6 U7.10 U7.11 U7.15 U7.16 U7.20 Y1.2 Y1.4 | length 1453.2
  Top Layer 1 w8: v2(2980,3135) 2984.6,3135 2988.68,3139.08 U1.12
  Top Layer 1 w10: v2(1254.7,3181.59) 1255.29,3180.99 C16.2 ; v2(1270,3090) 1292.28,3067.72 1292.28,3055.76 1302.05,3045.99 C15.2 ; v2(1605,3115) 1635.94,3115 1648.71,3102.23 U3.13 ; v2(1627.05,3746.64) 1687.06,3746.64 C23.1 ; U3.5 1673.71,2795.86 1686.7,2782.87 1697.13,2782.87 v2(1700,2780) ; C10.2 C10.2@2134.23,3240.77 ; v2@2134.23,3304.23 v2(2135,3305) ; U2.1 2175.64,3123.9 v2(2239.43,3123.9) ; C24.1 2550.33,3654.84 v2(2552.44,3656.95) ; v2(2583.42,2566.27) 2584.17,2567.02 C21.1 ; v2(2705,2640) 2705,2604.43 2744.54,2564.89 2744.54,2561.94 U4.1 ; C1.2 2724.31,3535.69 2724.31,3594.31 v2(2725,3595) ; C2.1 2750,3421.54 v2(2750,3480) ; v2(2950,2675) 2950,2733.46 C5.1 ; R4.2 3000.94,2615 3005.94,2610 v2(3010,2610) ; C4.1 3181.54,2795 v2(3240,2795) ; C25.1 3227.48,3086.54 3235.94,3095 v2(3240,3095) ; v2@3292.42,2993.36 3347.27,2993.36 Y1.4 3347.62,2996.96 3368.11,3017.45 3368.11,3021.2 3384.11,3037.2 3384.11,3045.26 Y1.2 3462.75,3059.95 v2(3463.72,3058.98)
  Top Layer 1 w12: C10.2 v2(2180,3240) ; C10.2@2134.23,3240.77 v2@2134.23,3304.23
  other v1: 1050,2100 1200,2100 1350,2100 1500,2100 1650,2100 1800,2100 1950,2100 2100,2100 3150,2100 3300,2100 3450,2100 3600,2100 3750,2100 3900,2100 4050,2100 4200,2100 4350,2100 4500,2100 4650,2100 4800,2100 1125,2250 1275,2250 1425,2250 1575,2250 1725,2250 2175,2250 2325,2250 2475,2250 2625,2250 2775,2250 3075,2250 3225,2250 3375,2250 3525,2250 3675,2250 3825,2250 3975,2250 4575,2250 4725,2250 4875,2250 1050,2400 1200,2400 1350,2400 1500,2400 1650,2400 1800,2400 1950,2400 2100,2400 2400,2400 3150,2400 3300,2400 3450,2400 3600,2400 3750,2400 3900,2400 4050,2400 4200,2400 4350,2400 4500,2400 4650,2400 4800,2400 1125,2550 1275,2550 1725,2550 1875,2550 2025,2550 2175,2550 3675,2550 3975,2550 4125,2550 4275,2550 4425,2550 4575,2550 4875,2550 1050,2700 1200,2700 1350,2700 1500,2700 1950,2700 2100,2700 3150,2700 3300,2700 3450,2700 3900,2700 4050,2700 4200,2700 4500,2700 1275,2850 1425,2850 2175,2850 2325,2850 2625,2850 3975,2850 4125,2850 4425,2850 4575,2850 4875,2850 1050,3000 1800,3000 1950,3000 2700,3000 2850,3000 3450,3000 3600,3000 3900,3000 4200,3000 4350,3000 4500,3000 4650,3000 4800,3000 1125,3150 1575,3150 1875,3150 2775,3150 2925,3150 4575,3150 4725,3150 1050,3300 1200,3300 1350,3300 1500,3300 1650,3300 1800,3300 1950,3300 2250,3300 4350,3300 4500,3300 4650,3300 4800,3300 1125,3450 1275,3450 1425,3450 1575,3450 1725,3450 1875,3450 2025,3450 2625,3450 3375,3450 3525,3450 3675,3450 3825,3450 3975,3450 4125,3450 4275,3450 4425,3450 4575,3450 4725,3450 1050,3600 1200,3600 1350,3600 1500,3600 1650,3600 1800,3600 2100,3600 2850,3600 3150,3600 3300,3600 3450,3600 3600,3600 3750,3600 3900,3600 4050,3600 1125,3750 1275,3750 1425,3750 1575,3750 2175,3750 2475,3750 2625,3750 2775,3750 2925,3750 3075,3750 3225,3750 3375,3750 3525,3750 3675,3750 3825,3750 3975,3750 4125,3750 4275,3750 4425,3750 4875,3750
  other v2: 3290,2995
  other v3: 2267.76,3652.76 2315,3652.76 2362.24,3652.76 2267.76,3700 2315,3700 2362.24,3700
GPS_INT: U1.2 U7.19 | length 859
  Top Layer 1 w8: U1.2 3163.05,2942.23 3280,2825.28 ; 3280,2825 3300,2805 3445,2805 3560,2690 U7.19
  Top Layer 1 w10: 3280,2825 3280,2825.28
IMU_INT1: U1.38 U5.12 | length 1028.7
  Top Layer 1 w8: U5.12 1921.86,3672.78 1921.86,3665.04 2121.9,3465 v2(2260,3465) ; v2(2385,3465) 2540,3310 2540,3155.1 2574.97,3120.13 2618.99,3120.13 U1.38
  Bottom Layer 1 w8: v2(2260,3465) v2(2385,3465)
IMU_INT2: U1.39 U5.11 | length 1017.1
  Top Layer 1 w8: U5.11 1901.69,3673.28 1901.69,3659.76 2146.45,3415 v2(2255,3415) ; v2@2342.08,3415.56 2347.64,3410 v2(2347.64,3409.61) ; v2@2347.84,3409.81 2469.61,3288.03 2469.61,3200.04 2569.2,3100.44 2618.99,3100.44 U1.39
  Bottom Layer 1 w8: v2(2255,3415) v2@2338.04,3415
MCU_RX_GPS_TX: U1.17 U7.13 | length 1448.4
  Top Layer 1 w10: U1.17 3955.66,3290.66 4010,3345 4248.13,3345 4310,3283.13 U7.13
MCU_TX_GPS_RX: U1.16 U7.14 | length 1266.8
  Top Layer 1 w10: U1.16@3060.66,3217.82 3962.82,3217.82 4050,3305 4186.72,3305 4210,3281.72 U7.14
MISO: P2.3 U1.56 U4.5 | length 875.5
  Top Layer 1 w8: U4.5 2823.2,2500.01 2826.09,2502.9 2830.37,2502.9 2846.5,2519.02 2846.5,2582.33 2851.5,2587.33 2851.5,2704.94 2819.87,2736.57 2819.87,2789.6 2825.42,2795.15 U1.56@2825.42,2848.36
  Top Layer 1 w10: U4.5 2824.23,2496.03 2874.14,2496.03 2880,2490.17 v2(2880,2350)
  Bottom Layer 1 w10: P2.3 2880,2225 v2(2880,2350)
MOSI: P2.4 U1.57 U4.3 | length 933.2
  Top Layer 1 w8: v2(2796.3,2668.7) 2796.3,2561.35 U4.3 ; U1.57 2845.7,2849.04 2845.7,2765.67 v2(2846.37,2765)
  Bottom Layer 1 w8: P2.4 2690,2135 2690,2552.52 2740.87,2603.4 2740.87,2615.87 2793.7,2668.7 v2(2796.3,2668.7) 2846.37,2718.76 v2(2846.37,2765)
NetC12_2: C12.2 U1.30 | length 302.9
  Top Layer 1 w10: U1.30 2726.92,3374.14 2732.78,3380 2785,3380 2806.54,3401.54 C12.2
NetC13_2: C13.2 U3.3 U3.10 U3.11 | length 820.7
  Top Layer 1 w12: U3.3 1624.02,2852.21 1624.02,2745.98 v2(1625,2745) ; U3.11 U3.10 1724.02,3041.91 1724.02,3100.12 1732.69,3108.79 1732.69,3109.34 1745,3121.65 1806.42,3121.65 1841.54,3086.54 C13.2@1841.54,2950 ; C13.2 1830,2947.79 v2(1830,2895)
  Bottom Layer 1 w12: v2(1625,2745) 1625,2792.88 1727.12,2895 v2(1830,2895)
NetD1_2: D1.2 R2.1 | length 86.7
  Top Layer 1 w25: D1.2 1480,3419.71 R2.1
NetD2_2: D2.2 R1.2 | length 58.2
  Top Layer 1 w8: D2.2 3390.59,3555.19 R1.2
NetD3_2: D3.2 R7.2 | length 54.5
  Top Layer 1 w8: D3.2 R7.2
NetR4_1: R4.1 U1.60 | length 245.8
  Top Layer 1 w8: R4.1@2902.49,2622.51 2902.49,2623.89 2899.39,2626.99 2898.01,2626.99 2883.18,2641.82 2883.18,2752.5 2900,2769.32 2900,2809.17 2903.36,2812.52 2903.36,2847.59 2902.66,2848.29 2902.32,2848.62 U1.60
NetR10_1: R10.1 U5.2 | length 92.4
  Top Layer 1 w6: U5.2 1960.35,3695.14 1960.55,3695.34 1970.62,3695.34 1975.26,3699.98 R10.1
nRST: C11.2 P5.10 SW1.1 SW1.2 U1.7 | length 2003.1
  Top Layer 1 w10: P5.10 2435.12,2410.99 2531.11,2315 2885,2315 3090.54,2520.54 3108.41,2520.54 C11.2 ; U1.7 3007.52,3040.66 2990.86,3024 2990.86,2901.02 3117.34,2774.54 3117.34,2537.45 C11.2 ; SW1.2 SW1.1 3121.45,2533.58 C11.2
OSC_IN: C7.1 U1.5 Y1.1 | length 467.4
  Top Layer 1 w10: U1.5@3060.66,3001.29 3178.71,3001.29 3296.64,2883.36 C7.1@3390.85,2883.36 ; C7.1@3392.46,2893.36 3398.8,2899.69 Y1.1@3398.8,2979.12
OSC_OUT: C8.1 U1.6 Y1.3 | length 433
  Top Layer 1 w8: U1.6@3060.66,3020.97 3205.97,3020.97 3290,3105 3290,3140.31 3294.69,3145 C8.1 ; C8.1@3331.69,3145 3347.62,3129.08 Y1.3
S\A\F\E\B\O\O\T\: U1.21 U7.8 | length 2256.2
  Top Layer 1 w8: v2(2885,3380) 2885,3350 2903.35,3331.65 2903.35,3291.39 U1.21 ; v2(3520,3190) 3950,3190 4370,2770 U7.8
  Bottom Layer 1 w8: v2(2885,3380) 2965,3460 3250,3460 v2(3520,3190)
SCK: P2.2 U1.55 U4.4 | length 882.9
  Top Layer 1 w8: U1.55 2807.42,2849.71 2807.42,2814.54 2805.4,2812.52 2805.4,2805.4 2801.87,2801.87 2801.87,2712.94 2825,2689.82 v2(2825,2630)
  Top Layer 1 w10: U4.4 2823.2,2628.2 v2(2825,2630)
  Bottom Layer 1 w8: v2(2825,2630) 2900.77,2554.23
  Bottom Layer 1 w10: P2.2 2907.5,2152.5 2907.5,2547.5 2900.77,2554.23
SCL: J2.1 R9.1 U1.41 U5.1 U6.6 U7.12 | length 4306.3
  Top Layer 1 w6: U6.6 2290,3505 2290,3260 2348.53,3201.47 2348.53,3151.47 2367.99,3132.01 2450.77,3132.01 2522.44,3060.34 U1.41 2619.71,3060.34 U1.41@2619.06,3061
  Top Layer 1 w8: U5.1 1940.35,3675.45 2110.81,3505 2145,3505 ; v2(2145,3620) 2145,3505 ; v2(2145,3720) 2145,3782.55 2224.45,3862 ; 2290,3505 2145,3505 ; 4242.5,3532.5 4305,3595 4410,3595 J2.1
  Top Layer 1 w12: 2224.45,3862 3913,3862 4242.5,3532.5 4410,3365 U7.12
  Bottom Layer 1 w8: v2(2145,3620) v2(2145,3720)
SDA: J2.2 R8.1 U1.40 U5.4 U6.5 U7.9 | length 5269
  Top Layer 1 w8: U5.4 2080,3734.51 ; 2175,3900 2080,3805 2080,3734.51 ; U6.5 2238.14,3568 2238.14,3588.48 2188.84,3637.78 2188.74,3637.67 2188.74,3637.88 2095.97,3730.65 2092.6,3730.65 2088.75,3734.51 2080,3734.51 ; 2240,3588.48 2255,3603.48 2255,3605.31 2259.69,3610 2285.61,3610 2321.14,3574.47 2321.14,3388.86 2393.36,3316.64 2393.36,3250 2390,3250 2390,3234.69 2544.66,3080.03 U1.40 U1.40@2619.71,3080.03 ; J2.2 4515,3665 4645,3795
  Top Layer 1 w12: 2175,3900 4540,3900 4645,3795 4895,3545 4895,2975 4790,2870 U7.9
SWCLK: P5.4 U1.49 | length 350.7
  Top Layer 1 w10: 2615,2777.17 U1.49
  Top Layer 1 w12: P5.4@2428.21,2700 2587.97,2700 2595,2707.03 2595,2757.17 2615,2777.17
SWDIO: P5.2 U1.46 | length 493
  Top Layer 1 w8: 2422.03,2996.66 2533.34,2996.66 2568.08,2961.92 U1.46
  Top Layer 1 w12: 2422.03,2996.66 2400,2974.63 2400,2758.56 2408.57,2750 P5.2
TP: U1.22 U7.7 | length 2170.2
  Top Layer 1 w8: U1.22 2884.4,3230.6 2890,3225 3004.91,3225 3025.23,3245.32 v2(3375,3245.32) ; v2(3470,3190) 3470,3155 3480,3145 3905,3145 4380,2670 U7.7
  Bottom Layer 1 w8: v2(3375,3245.32) 3414.68,3245.32 v2(3470,3190)
usb_N: C15.1 J1.2 R6.1 | length 224.9
  Top Layer 1 w15: J1.2 1257.88,2976.85 1279.78,2998.75 C15.1 1330.22,2998.75 1333.97,2995 R6.1
usb_P: C14.1 J1.3 R5.1 | length 235.5
  Top Layer 1 w15: J1.3 1257.15,2951.26 1274.78,2933.62 C14.1 1337.31,2933.62 1370.93,2900 R5.1
USER_BUTTON: SW2.1 SW2.2 U1.50 | length 1279.9
  Top Layer 1 w8: SW2.2 SW2.2@2063.58,2303.43 ; SW2.1 SW2.2@2063.58,2303.43 ; U1.50 2707.23,2757.69 2579.54,2630 2498.75,2630 2493.75,2625 2360,2625 2350,2615 2350,2541.48 2133.53,2325.02 2085.17,2325.02 SW2.2@2063.58,2303.43
USER_LED1: D2.1 U1.26 | length 691.8
  Top Layer 1 w8: U1.26 2806.39,3291.39 2806.39,3339.01 2943,3475.62 2943,3517.54 2985.46,3560 3295,3560 3300,3555 D2.1
USER_LED2: D3.1 U1.27 | length 770
  Top Layer 1 w8: U1.27 2785.97,3344.05 2925,3483.07 2925,3525 3075,3675 D3.1
VBUS: C16.1 C17.1 FB1.1 J1.1 | length 464.7
  Top Layer 1 w15: J1.1 1211.11,3002.44 1211.48,3002.81 1211.48,3008.08 1215,3011.6 1215,3105 1243.75,3133.75 C16.1 1319.2,3135.06 1403.92,3135.06 C17.1 1441.38,3136.38 1486.24,3181.24 1486.24,3186.67 1499.57,3200 FB1.1
VBUS_F: C9.1 C18.2 C19.1 FB1.2 U2.3 U3.12 | length 670.1
  Top Layer 1 w12: FB1.2@1561.34,3195 1629.17,3195 1653.28,3170.89 1653.28,3170.14 1662.05,3161.38 C19.1 1731.38,3161.38 1811.62,3241.62 C18.2 1876.36,3238.67 1918.5,3196.54 C9.1 1971.02,3152.99 1994.79,3129.22 U2.3 ; U3.12 1674.45,3043.06 1674.02,3043.48 1674.02,3078.73 1675,3079.72 C19.1@1675,3151.16
pads on no net: J1. J1.4 J1.SH1 J1.SH2 J1.SH3 J1.SH4 P5.6 P5.7 P5.8 U1.4 U1.8 U1.9 U1.10 U1.11 U1.14 U1.15 U1.20 U1.23 U1.24 U1.25 U1.28 U1.29 U1.34 U1.35 U1.36 U1.37 U1.44 U1.45 U1.51 U1.52 U1.53 U1.58 U1.59 U1.61 U1.62 U3.2 U3.6 U3.7 U3.14 U3.15 U3.16 U5.3 U7.1 U7.4

## Polygon pours and split planes (outlines as drawn)
3v3 on 3v3 "3V3_L02_P005" (solid, pour order 5): 1000,1970 1000,3975 4945,3975 4945,1970
GND on Bottom Layer 1 "GND_L04_P007" (solid, pour order 7): 1000,1970 1000,3975 4945,3975 4945,1970
GND on gnd "GND_L03_P006" (solid, pour order 6): 1000,1970 1000,3975 4945,3975 4945,1970
GND on Top Layer 1 "GND_L01_P004" (solid, pour order 4): 1000,1970 1000,3975 4945,3975 4945,1970

## Silkscreen, mask and mechanical layers (free items; w line width, h text height)
Top Overlay:
  text "LED2" at 3590,3655 h40
  text "LED1" at 3590,3545 h40
  text "SCL" at 4380,3510 h60 r270
  text "SDA" at 4485,3505 h60 r270
  text "GND" at 4590,3500 h60 r270
  text "GND" at 1385,2425 h40 r270
  text "RX" at 1480,2400 h40 r270
  text "TX" at 1575,2400 h40 r270
  text "BMP_CS" at 2565,2350 h30 r270
  text "MOSI" at 2645,2285 h30 r270
  text "MISO" at 2750,2285 h30 r270
  text "GND" at 2340,2270 h30 r270
  text "GND" at 2245,2265 h30 r270
  text "GND" at 2450,2265 h30 r270
  text "SCK" at 2855,2260 h30 r270
  text "3v3" at 2955,2260 h30 r270
  text "RST" at 3320,2225 h40
  text "USR_BTN" at 1805,2161.66 h40
Mechanical 1:
  the board outline again, w10

## Text inside footprints (layer, text, board x,y; h text height)
J1: Top 3D Body "PCB EDGE" at 1013.86,2766.22 h30 r270
P2: Top Overlay "8" at 2275,2035 h40 r180; Top Overlay "1" at 2965,2035 h40 r180